# Altium PCB sonar.PcbDoc
Units mil, origin at the board's own origin, x right, y up, seen from the top; angles counter-clockwise.
Board outline 3750.01 x 3750.01 mil, 2 copper layers (Top Layer, Bottom Layer); 96 components, 84 nets, 304 pads, 59 vias.
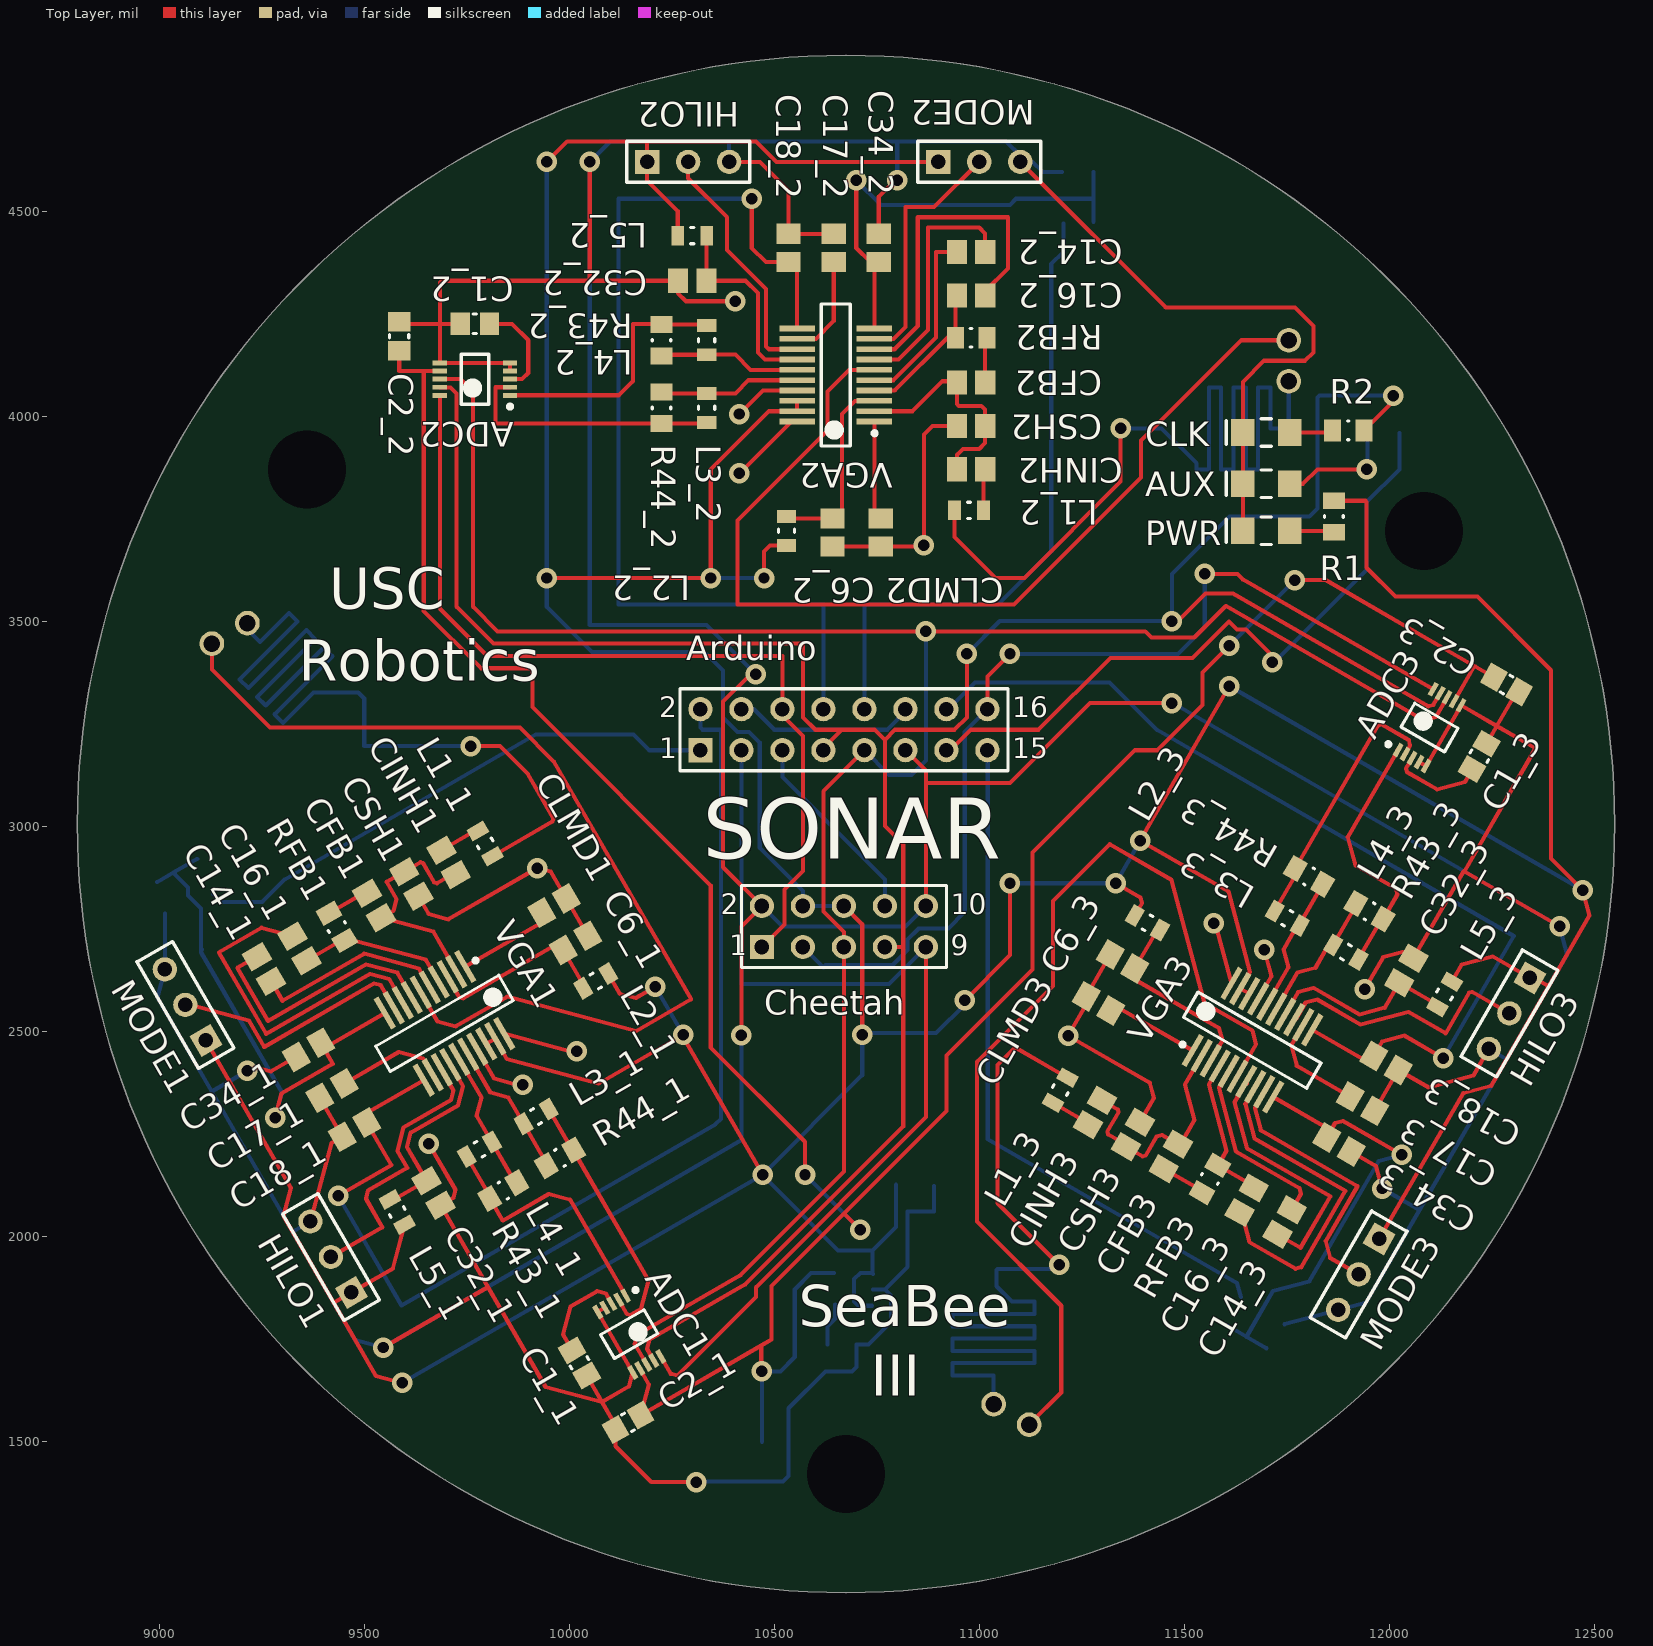
[diagram p0: Top Layer view]
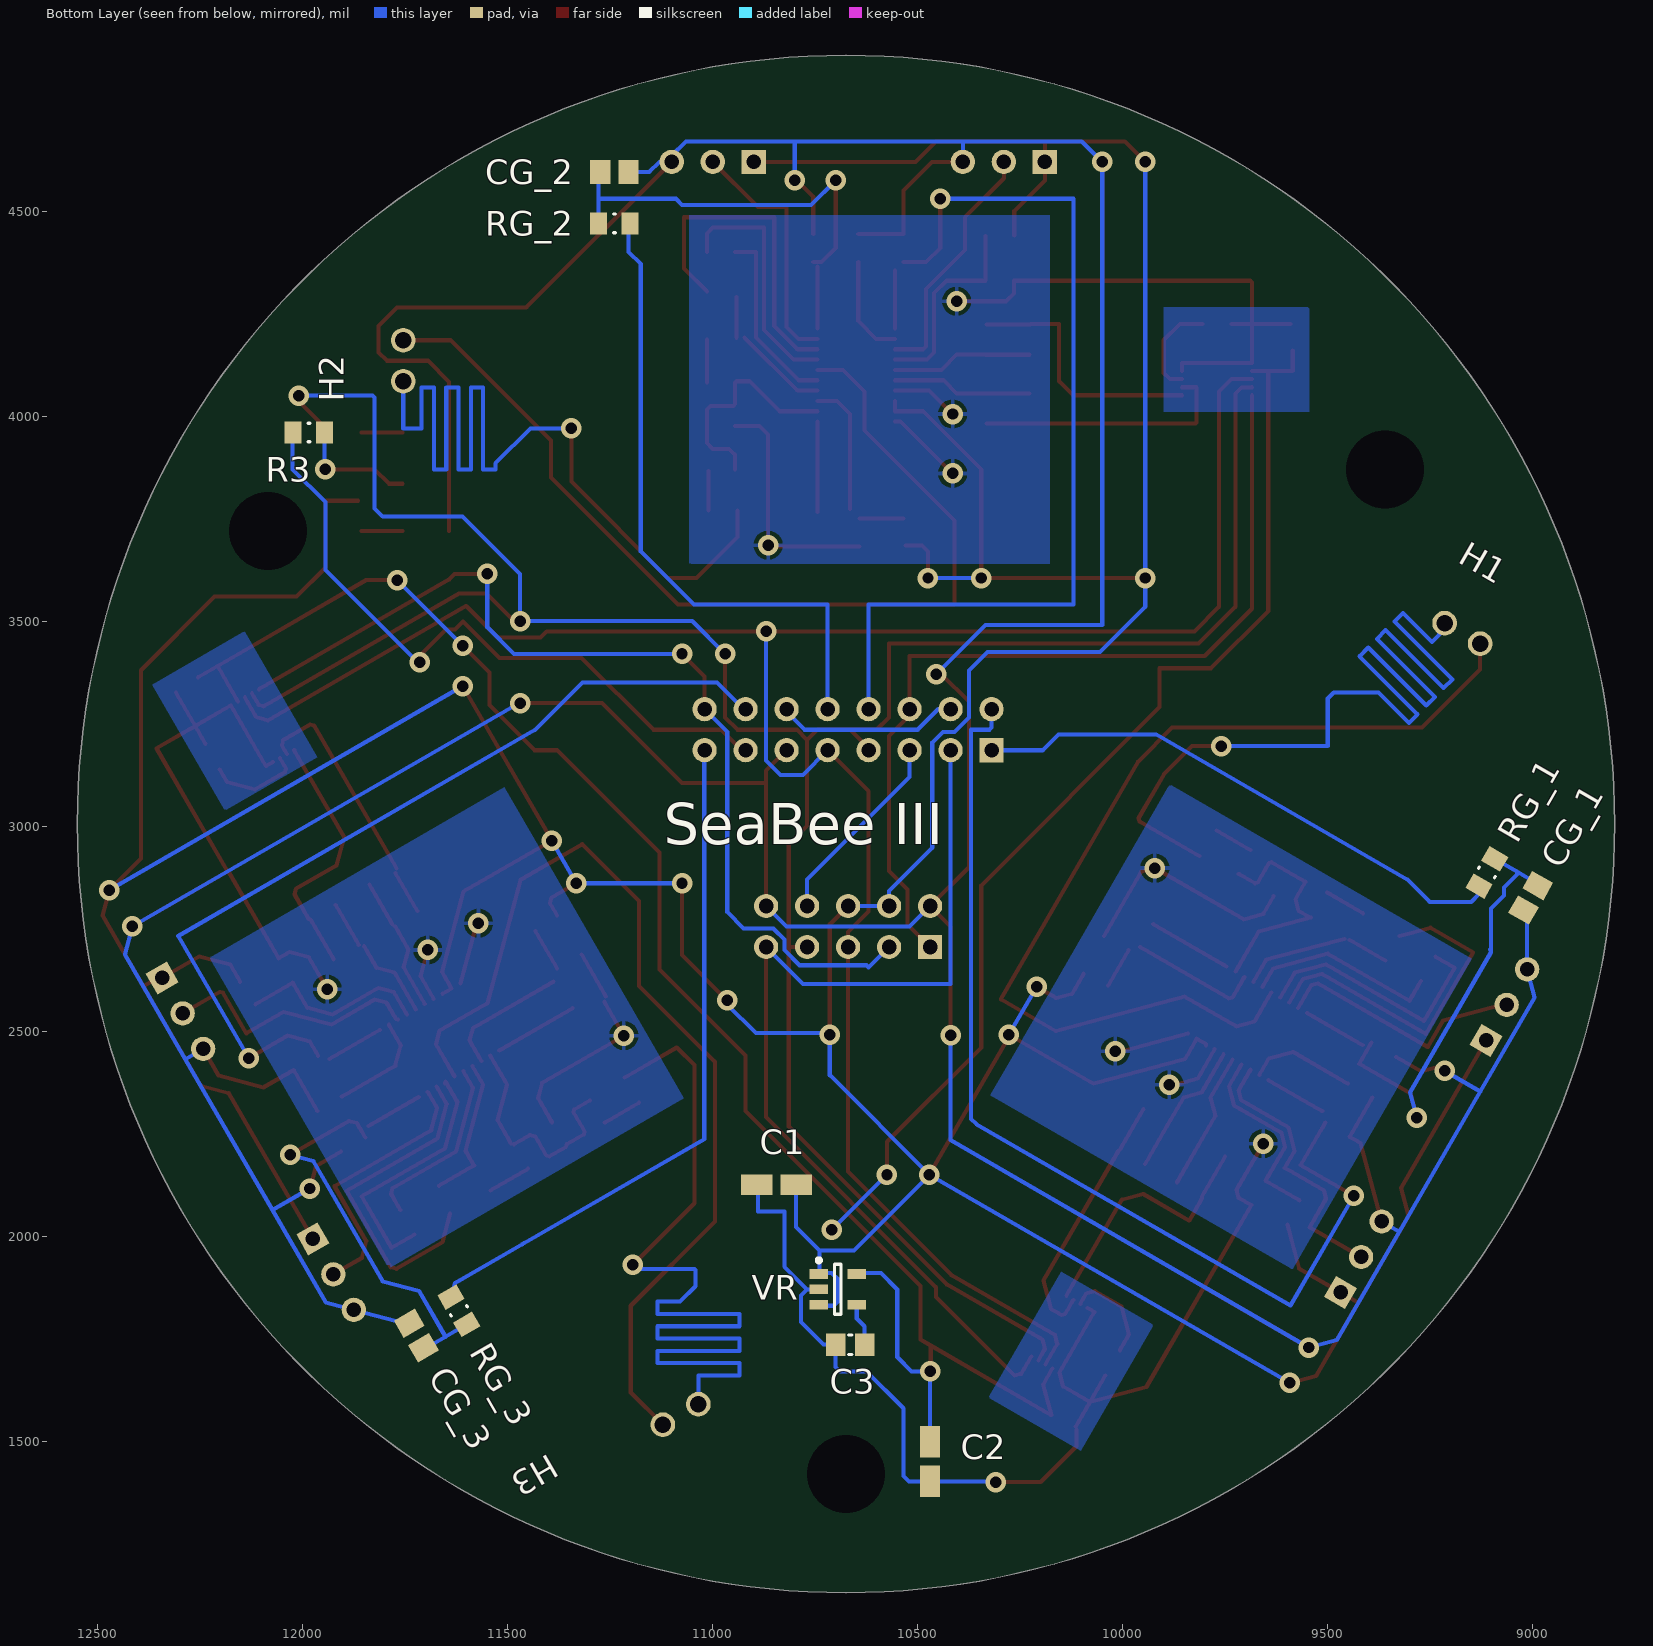
[diagram p1: Bottom Layer view, seen from below]

## Layer stack, top to bottom
Top Layer: signal copper 1.4
Dielectric: dielectric 12.6, FR-4, Dk 4.8
Bottom Layer: signal copper 1.4

## Board outline
8799.99,3005 ccw(c10675,3005) 10675,1129.99 ccw(c10675,3005) 12550.01,3005 ccw(c10675,3005) 10675,4880.01 ccw(c10675,3005)

## Design rules (kind name [scope] priority, off if disabled: settings)
Clearance [All] p1: gap=7
DiffPairsRouting [All] p1: maxlimit=10 minlimit=10 mostfreqgap=10 maxuncoupledlength=500
HoleSize [All] p1: absolutevalues=TRUE maxlimit=200 minlimit=1 maxpercent=80.000 minpercent=20.000
HoleToHoleClearance [All] p1: gap=5 allowstackedmicrovias=TRUE
MinimumSolderMaskSliver [All] p1: minsoldermaskwidth=1
PolygonConnect [All] p1: connectstyle=Relief reliefconductorwidth=10 reliefentries=4 polygonreliefangle="90 Angle"
RoomDefinition sonar [InComponentClass('sonar')] p1: confinementstyle=ConfineIn formatcopy=TRUE lockcomponents=FALSE outline 0,0 14740,0 14740,6225 0,6225
RoutingVias [All] p1: holewidth=28 width=50 viastyle="Through Hole" minholewidth=28 minwidth=50 maxholewidth=28 maxwidth=50
SilkToSilkClearance [All] p1: silktosilkclearance=0
SilkscreenOverComponentPads [All] p1: minsilkscreentomaskgap=0
SolderMaskExpansion [All] p1: expansion=4
TestPointUsage [All] p1: valid=0 allowmultiple=FALSE
Testpoint [All] p1: side=15 testpointundercomponent=TRUE minsize=40 maxsize=100 preferedsize=60 minholesize=0 maxholesize=40 preferedholesize=32 testpointgrid=1 style=1023 order=0-112345678
Width [All] p1: maxlimit=10 minlimit=10 preferedwidth=10
18 further rules are at their usual default settings.

## Classes and differential pairs
differential pair VGA1: +VGA1_P -VGA1_N
differential pair VGA2: +VGA2_P -VGA2_N
differential pair VGA3: +VGA3_P -VGA3_N
differential pair H1: +H1_P -H1_N
differential pair H2: +H2_P -H2_N
differential pair H3: +H3_P -H3_N

## Components (designator, comment, footprint, x,y, rotation, side; value= is the part's Value field where it differs from the comment)
ADC1 "LTC14031" ADC 10146.11,1760.61 r300 top
ADC2 "LTC14031" ADC 9770,4090 r180 top
ADC3 "LTC14031" ADC 12098.45,3240.06 r60 top
Arduino "Header 8X2" HDR2X8 10320,3185 r0 top
AUX "LED3" LED 11700,3835 r180 top
C1 "Cap" cap_vreg_1uf 10845,2125 r0 bottom
C1_1 "Cap" cap_adc_10uf 10024.87,1690.61 r120 top
C1_2 "Cap" cap_adc_10uf 9770,4225 r0 top
C1_3 "Cap" cap_adc_10uf 12219.69,3170.06 r240 top
C2 "Cap" cap_vreg_1uf 10470,1450 r90 bottom
C2_1 "Cap" cap_adc_10uf 10143.35,1545.4 r30 top
C2_2 "Cap" cap_adc_10uf 9585,4195 r270 top
C2_3 "Cap" cap_adc_10uf 12286.21,3345.27 r150 top
C3 "Cap" CAP_VREG_470PF 10665,1735 r180 bottom
C6_1 "Cap" CAP_VGA_01UF 10015.55,2715.06 r210 top
C6_2 "Cap" CAP_VGA_01UF 10642.05,3716.06 r90 top
C6_3 "Cap" CAP_VGA_01UF 11349.79,2669.57 r330 top
C14_1 "Cap" CAP_VGA_01UF 9255.49,2651.52 r300 top
C14_2 "Cap" CAP_VGA_01UF 10980,4400 r180 top
C14_3 "Cap" CAP_VGA_01UF 11744.89,2033.9 r60 top
C16_1 "Cap" CAP_VGA_01UF 9342.09,2701.52 r300 top
C16_2 "Cap" CAP_VGA_01UF 10980,4294.02 r180 top
C16_3 "Cap" CAP_VGA_01UF 11652.38,2087.31 r60 top
C17_1 "Cap" CAP_VGA_01UF 9421.16,2354.57 r30 top
C17_2 "Cap" CAP_VGA_01UF 10645,4410 r270 top
C17_3 "Cap" CAP_VGA_01UF 11934.71,2322.68 r150 top
C18_1 "Cap" CAP_VGA_01UF 9476.16,2259.3 r30 top
C18_2 "Cap" CAP_VGA_01UF 10535,4410 r270 top
C18_3 "Cap" CAP_VGA_01UF 11992.21,2422.27 r150 top
C32_1 "Cap" CAP_VGA_01UF 9669.1,2105.12 r120 top
C32_2 "Cap" CAP_VGA_01UF 10300,4330 r0 top
C32_3 "Cap" CAP_VGA_01UF 12041.59,2647.8 r240 top
C34_1 "Cap" CAP_VGA_01UF 9363.66,2454.16 r30 top
C34_2 "Cap" CAP_VGA_01UF 10755,4410 r270 top
C34_3 "Cap" CAP_VGA_01UF 11877.21,2223.09 r150 top
CFB1 "Cap" CAP_VGA_01UF 9523.96,2806.52 r300 top
CFB2 "Cap" CAP_VGA_01UF 10980,4082.05 r180 top
CFB3 "Cap" CAP_VGA_01UF 11467.37,2194.13 r60 top
CG_1 "Cap" CAP_VGA_01UF 9005,2825 r120 bottom
CG_2 "Cap" CAP_VGA_01UF 11240,4595 r180 bottom
CG_3 "Cap" CAP_VGA_01UF 11722.98,1757.67 r60 bottom
Cheetah "Header 5X2" HDR2X5 10470,2705 r0 top locked
CINH1 "Cap" CAP_VGA_01UF 9705.82,2911.52 r120 top
CINH2 "Cap" CAP_VGA_01UF 10980,3870.08 r0 top
CINH3 "Cap" CAP_VGA_01UF 11282.36,2300.94 r240 top
CLK "LED3" led 11700,3960 r180 top
CLMD1 "Cap" CAP_VGA_01UF 9963.05,2805.99 r210 top
CLMD2 "Cap" CAP_VGA_01UF 10760,3716.06 r90 top
CLMD3 "Cap" CAP_VGA_01UF 11290.81,2567.42 r330 top
CSH1 "Cap" CAP_VGA_01UF 9614.89,2859.02 r120 top
CSH2 "Cap" CAP_VGA_01UF 10980,3976.06 r0 top
CSH3 "Cap" CAP_VGA_01UF 11374.86,2247.54 r240 top
H1 "Header 2" bnc 9215,3495 r210 bottom locked
H2 "Header 2" bnc 11755,4085 r90 bottom locked
H3 "Header 2" bnc 11035,1590 r330 bottom locked
HILO1 "Header 3" HDR1X3 9468.62,1862.36 r120 top
HILO2 "Header 3" HDR1X3 10190,4620 r0 top
HILO3 "Header 3" HDR1X3 12342.92,2629.71 r240 top
L1_1 "FB Inductor" ind_vga_120nh 9794.93,2957.19 r120 top
L1_2 "FB Inductor" ind_vga_120nh 10975,3770 r0 top
L1_3 "FB Inductor" ind_vga_120nh 11197.47,2355.73 r240 top
L2_1 "FB Inductor" ind_vga_120nh 10064.64,2622.16 r210 top
L2_2 "FB Inductor" ind_vga_120nh 10530,3720 r90 top
L2_3 "FB Inductor" ind_vga_120nh 11410.14,2764.1 r330 top
L3_1 "FB Inductor" ind_vga_120nh 9919.36,2291.66 r210 top
L3_2 "FB Inductor" ind_vga_120nh 10335,4020 r90 top
L3_3 "FB Inductor" ind_vga_120nh 11751.29,2774.99 r330 top
L4_1 "FB Inductor" ind_vga_120nh 9780.8,2211.66 r30 top
L4_2 "FB Inductor" ind_vga_120nh 10335,4185 r270 top
L4_3 "FB Inductor" ind_vga_120nh 11894.19,2692.49 r150 top
L5_1 "FB Inductor" ind_vga_120nh 9580.53,2058.53 r120 top
L5_2 "FB Inductor" ind_vga_120nh 10300,4440 r0 top
L5_3 "FB Inductor" ind_vga_120nh 12134.88,2589.39 r240 top
MODE1 "Header 3" HDR1X3 9113.63,2477.23 r120 top
MODE2 "Header 3" HDR1X3 10900,4620 r0 top
MODE3 "Header 3" HDR1X3 11975.42,1993.18 r240 top
PWR "LED3" LED 11700,3720 r180 top
R1 "Res3" res_vga_274 11865,3755 r90 top
R2 "Res3" res_vga_274 11900,3965 r0 top
R3 "Res3" res_vga_274 11985,3960 r0 bottom
R43_1 "Res3" res_vga_274 9839.01,2110.84 r210 top
R43_2 "Res3" res_vga_274 10225,4185 r90 top
R43_3 "Res3" res_vga_274 11951.69,2792.08 r330 top
R44_1 "Res3" res_vga_274 9977.57,2190.84 r30 top
R44_2 "Res3" res_vga_274 10225,4020 r270 top
R44_3 "Res3" res_vga_274 11804.46,2877.08 r150 top
RFB1 "Res3" res_vga_274 9433.03,2754.02 r120 top
RFB2 "Res3" res_vga_274 10980,4190.98 r0 top
RFB3 "Res3" res_vga_274 11562.43,2139.24 r240 top
RG_1 "Res3" res_vga_274 9111.92,2886.78 r300 bottom
RG_2 "Res3" res_vga_274 11240,4470 r0 bottom
RG_3 "Res3" res_vga_274 11619.05,1817.67 r60 bottom
VGA1 "AD8331" VGA 9695.79,2518.9 r300 top
VGA2 "AD8331" VGA 10650,4100 r180 top
VGA3 "AD8331" VGA 11666.24,2477.68 r60 top
VR "3VOLT_REG" 3VOLT_REG 10695,1870 r180 bottom

## Footprints (in the part's own frame and the unit in brackets; to place one, negate y for a bottom-side part, rotate by r counter-clockwise, add the part's x,y. Pads: shape width x height; smd on the part's side, far side on the other; paste and mask are expansions set on the pad)
3VOLT_REG [mm] "SOT23, 5-Leads, Body 3.1x3.2mm (max), Pitch 0.95mm, IPC Medium Density"
  rect 1.15x0.6 smd: 1(-1.175,0.95) 2(-1.175,0) 3(-1.175,-0.95) 4(1.175,-0.95) 5(1.175,0.95)
  silkscreen extent -1.3,-1.55 0.2,1.92, body extent -0.9,-1.55 0.9,1.55, height 1.45
ADC [mm] "TSSOP, 10-Leads, Body 3.1x3.1mm (max), Pitch 0.50mm, IPC Medium Density"
  rect 0.889x0.305 smd: 1(-2.17,1) 2(-2.17,0.5) 3(-2.17,0) 4(-2.17,-0.5) 5(-2.171,-1) 6(2.17,-1) 7(2.17,-0.5) 8(2.171,0) 9(2.17,0.5) 10(2.17,1)
  silkscreen extent -2.3,-1.55 0.85,1.83, body extent -1.55,-1.55 1.55,1.55, height 1.1
bnc [mil]
  round 60 hole 40: 1(0,0) 2(100,0)
  body extent -275,-2275 312,106, height 625
cap_adc_10uf [mm] "Chip Capacitor, 2-Leads, Body 2.0x1.3mm, IPC Medium Density"
  rect 1.2x1.4 smd: 1(-0.9,0) 2(0.9,0)
  silkscreen extent -0.1,-0.6 0.1,0.6, body extent -1.05,-0.68 1.05,0.68, height 0.95
CAP_VGA_01UF [mm] "Chip Capacitor, 2-Leads, Body 2.0x1.3mm, IPC Medium Density"
  rect 1.25x1.5 smd: 1(-0.875,0) 2(0.875,0)
  body extent -1.11,-0.73 1.11,0.73, height 0.94
cap_vreg_1uf [mm] "Molded Capacitor, 2-Leads, Body 3.2x1.6mm, IPC Medium Density"
  rect 1.95x1.25 smd: 1(-1.225,0) 2(1.225,0)
  body extent -1.7,-0.9 1.7,0.9, height 1.8
CAP_VREG_470PF [mm] "Chip Capacitor, 2-Leads, Body 2.0x1.3mm, IPC Medium Density"
  rect 1.2x1.4 smd: 1(-0.9,0) 2(0.9,0)
  silkscreen extent -0.1,-0.6 0.1,0.6, body extent -1.05,-0.67 1.05,0.67, height 0.7
HDR1X3 [mm] "Connector; Header; 3 Position"
  rect 1.5x1.5 hole 0.9: 1(0,0)
  round 1.5 hole 0.9: 2(2.54,0) 3(5.08,0)
  silkscreen extent -1.27,-1.27 6.35,1.27
HDR2X5 [mm] "Connector; Header; 5x2 Position"
  rect 1.5x1.5 hole 0.9: 1(0,0)
  round 1.5 hole 0.9: 2(0,2.54) 3(2.54,0) 4(2.54,2.54) 5(5.08,0) 6(5.08,2.54) 7(7.62,0) 8(7.62,2.54) 9(10.16,0) 10(10.16,2.54)
  silkscreen extent -1.27,-1.27 11.43,3.81
HDR2X8 [mm] "Connector; Header; 8x2 Position"
  rect 1.5x1.5 hole 0.9: 1(0,0)
  round 1.5 hole 0.9: 2(0,2.54) 3(2.54,0) 4(2.54,2.54) 5(5.08,0) 6(5.08,2.54) 7(7.62,0) 8(7.62,2.54) 9(10.16,0) 10(10.16,2.54) 11(12.7,0) 12(12.7,2.54) 13(15.24,0) 14(15.24,2.54) 15(17.78,0) 16(17.78,2.54)
  silkscreen extent -1.27,-1.27 19.05,3.81
ind_vga_120nh [mm] "Chip Inductor, 2-Leads, Body 1.9x1.3mm, IPC Medium Density"
  rect 0.8x1.2 smd: 1(-0.9,0) 2(0.9,0)
  silkscreen extent -0.1,-0.5 0.1,0.5, body extent -1,-0.73 1,0.73, height 0.85
LED [mm] "Molded Diode, 2-Leads, Body 3.2x1.6mm, IPC Medium Density"
  rect 1.45x1.65 smd: 1(-1.45,0) 2(1.45,0)
  silkscreen extent -0.33,-0.85 2.48,0.85, body extent -1.6,-0.8 1.6,0.8, height 1.1
led [mm] "Molded Diode, 2-Leads, Body 3.2x1.6mm, IPC Medium Density"
  rect 1.45x1.65 smd: 1(-1.45,0) 2(1.45,0)
  silkscreen extent -0.33,-0.85 2.48,0.85, body extent -1.6,-0.8 1.6,0.8, height 1.1
res_vga_274 [mm] "Chip Resistor, 2-Leads, Body 2.0x1.3mm, IPC Medium Density"
  rect 1.05x1.35 smd: 1(-0.975,0) 2(0.975,0)
  silkscreen extent -0.05,-0.58 0.05,0.58, body extent -1.05,-0.68 1.05,0.68, height 0.6
VGA [mm] "SOP, 20-Leads, Body 8.8x4.0mm (max), Pitch 0.64mm, IPC Medium Density"
  rect 2.2x0.35 smd: 1(-2.4,2.88) 2(-2.4,2.24) 3(-2.4,1.6) 4(-2.4,0.96) 5(-2.4,0.32) 6(-2.4,-0.32) 7(-2.4,-0.96) 8(-2.4,-1.6) 9(-2.4,-2.24) 10(-2.4,-2.88) 11(2.4,-2.88) 12(2.4,-2.24) 13(2.4,-1.6) 14(2.4,-0.96) 15(2.4,-0.32) 16(2.4,0.32) 17(2.4,0.96) 18(2.4,1.6) 19(2.4,2.24) 20(2.4,2.88)
  silkscreen extent -2.52,-4.4 0.9,4.4, body extent -2,-4.38 2,4.38, height 1.75

## Part data
ADC1 ADC2 ADC3: library part ADC
Arduino: "Header, 8-Pin, Dual row"
AUX CLK PWR: "Typical BLUE SiC LED"
C1 C1_1 C1_2 C1_3 C2 C2_1 C2_2 C2_3 C3 C6_1 C6_2 C6_3 C14_1 C14_2 C14_3 C16_1 C16_2 C16_3 C17_1 C17_2 C17_3 C18_1 C18_2 C18_3 C32_1 C32_2 C32_3 C34_1 C34_2 C34_3 CFB1 CFB2 CFB3 CG_1 CG_2 CG_3 CINH1 CINH2 CINH3 CLMD1 CLMD2 CLMD3 CSH1 CSH2 CSH3: "Capacitor"
Cheetah: "Header, 5-Pin, Dual row"
H1 H2 H3: "Header, 2-Pin"
HILO1 HILO2 HILO3 MODE1 MODE2 MODE3: "Header, 3-Pin"
L1_1 L1_2 L1_3 L2_1 L2_2 L2_3 L3_1 L3_2 L3_3 L4_1 L4_2 L4_3 L5_1 L5_2 L5_3: library part Inductor, "Inductor"
R1 R2 R3 R43_1 R43_2 R43_3 R44_1 R44_2 R44_3 RFB1 RFB2 RFB3 RG_1 RG_2 RG_3: "Resistor"
VGA1 VGA2 VGA3: library part VGA

## Free pads (board coordinates)
  round 130 hole 190: 1(9360,3870) 2(12085,3720) 3(10675,1420)

## Via types
v1: diameter 50, hole 28, Top Layer to Bottom Layer, 59 vias

## Nets (pads, with @x,y where several pads share a name; then routed paths per layer and width w, separated by ;. In a path a pad name is that pad's centre, name@x,y a point inside that pad or via, vN(x,y) a via of type N, cw(c..) or ccw(c..) an arc to the next point about the centre after c; other vN are vias at no path point)
3V: ADC1.7 ADC2.7 ADC3.7 C2.2 C2_1.2 C2_2.2 C2_3.2 VR.5 | length 6969.9
  Top Layer w10: C2_2.2@9585.32,4159.25 9585.32,4109.68 9645,4109.68 ; ADC2.7 9645,4109.68 ; ADC1.7 10194.12,1638.08 C2_1.2 10468.27,1732.99 ; v1@10468.27,1671.73 10468.27,1732.99 ; v1(10575,2150) 10575,2230 10345,2460 10345,2855 9910,3290 9910,3385 9785,3385 9645,3525 9645,4109.68 ; v1(10710,2015) 10670,2055 ; v1(11610,3440) 11545,3375 11545,3295 11435,3185 11380,3185 11130,2935 11130,2650 10920,2440 10920,2305 10670,2055 ; v1(11770,3600) 11845,3600 12210.47,3389 C2_3.2 ; ADC3.7 12206.56,3387.95 ; 10468.27,1732.99 10493.52,1747.57 10493.52,1878.52 10670,2055
  Bottom Layer w10: C2.2 v1(10470,1670) 10515,1670 10550,1705 10550,1870 10590,1910 VR.5@10646.14,1910 ; v1(10575,2150) v1(10710,2015) ; v1(11610,3440) v1(11770,3600)
5V: C1.1 Cheetah.4 Cheetah.6 HILO1.1 HILO2.1 HILO3.1 L2_1.1 L2_2.1 L2_3.1 L5_1.1 L5_2.1 L5_3.1 MODE1.1 MODE2.1 MODE3.1 R1.2 VGA1.18 VGA1.19 VGA2.18 VGA2.19 VGA3.18 VGA3.19 VR.1 VR.3 | length 15636.5
  Top Layer w10: MODE1.1 9321.12,2117.83 9302.82,2049.53 9425.32,1837.36 ; v1(9592.66,1641.9) 9528.2,1659.18 9425.32,1837.36 ; L5_1.1 9569.51,1920.6 HILO1.1 9425.32,1837.36 ; VGA1.18@9796.49,2464.48 VGA1.18 VGA1.19 9847.97,2431.68 10071.15,2371.88 v1(10277.64,2491.1) ; v1(9945,3605) v1@10340,3605 ; v1(9945,4620) 9995,4670 10190,4670 ; L2_1.1 10123.57,2590.95 10162.51,2580.51 v1(10210.14,2608.01) ; L5_2.1 10264.57,4500.43 10190,4575 HILO2.1 10190,4670 ; v1@10276.61,2487.26 v1(10471.67,2149.4) ; v1@10345,3590 v1(10345,3605) 10345,3870 10486.81,4011.81 VGA2.19 VGA2.18 ; v1(10475,3605) 10475,3670 10489.57,3684.57 L2_2.1 ; Cheetah.6 10714.53,2760.47 v1(10714.53,2490.47) ; MODE2.1 10505,4620 10455,4670 10190,4670 ; v1(10965,2575) 11075,2685 v1(11075,2860) ; v1(11333.05,2860.57) 11393.67,2825.57 11397.17,2812.51 L2_3.1 ; v1@11380.06,2972 v1(11393.05,2964.5) 11607.4,2840.74 11660.22,2643.62 VGA3.19 VGA3.18 ; v1@11392.74,2965.67 v1(11609.71,3341.49) ; R1.2 11941.61,3793.39 11945,3790 11945,3630 12015,3560 12215,3560 12395,3380 12395,2920.4 v1(12471.41,2843.99) 12488.2,2781.34 12388.72,2609.04 ; MODE3.1 12180.42,2348.25 12248.72,2366.55 12388.72,2609.04 ; L5_3.1 12176.85,2662.08 12251.98,2682.21 HILO3.1 ; HILO3.1@12349.75,2631.54 12388.72,2609.04
  Bottom Layer w10: v1(9592.66,1641.9) v1(10471.67,2149.4) ; v1(9945,4620) v1(9945,3605) 9945,3535 10055,3425 10190,3425 ; 10195.47,3425 10190,3425 ; v1(10210.14,2608.01) v1(10277.64,2491.1) ; v1(10345,3605) v1@10470,3605 ; v1@10470,3590 10475,3595 v1(10475,3605) ; Cheetah.6 Cheetah.4 10570,2841.72 10464.53,2947.19 10464.53,3203.44 10438.44,3229.53 10410.47,3229.53 10375.47,3264.53 10375.47,3379.53 10330,3425 10190,3425 ; VR.3@10738.66,1830 10705,1830 10695,1840 10695,1895 10710,1910 10738.66,1910 VR.1@10740,1908.66 ; VR.1 VR.1@10740,1908.66 ; C1.1 10796.77,2021.77 10740,1965 ; v1@10965,2565 10895,2495 10719.06,2495 v1(10714.53,2490.47) 10714.53,2392.26 v1(10471.67,2149.4) ; v1(11075,2860) 11075.57,2860.57 v1(11333.05,2860.57) v1(11393.05,2964.5) ; v1(11609.71,3341.49) v1(12471.41,2843.99) ; v1(10471.67,2149.4) 10471.13,2148.87 10655,1965 10740,1965 ; VR.1@10740,1908.66 10740,1965
12V: Arduino.4 Arduino.12 | length 439
  Bottom Layer w10: Arduino.4 10450,3285 10500,3235 10775.94,3235 Arduino.12@10820,3279.06
AUX: Arduino.13 R3.2 | length 1664.7
  Top Layer w10: Arduino.13 10930,3185 10980,3235 11145,3235 11320,3410 11520,3410 11609.15,3499.15 11628.81,3479.49 11650.51,3479.49 11715,3415 v1(11715,3400)
  Bottom Layer w10: v1(11715,3400) 11720,3400 11945,3625 11945,3790 12025,3870 R3.2@12025,3958.39
GAIN1: C34_1.2 CG_1.2 RG_1.1 VGA1.10 | length 1223.4
  Top Layer w10: v1(9282.79,2288.61) 9298.7,2348.01 9423.22,2419.9 C34_1.2 ; C34_1.2@9414.68,2465.71 VGA1.10
  Bottom Layer w10: CG_1.2@8994.3,2863.2 9038.02,2888.44 ; RG_1.1 9038.02,2888.44 ; 9103.59,2698.99 9101.76,2692.16 ; v1(9282.79,2288.61) 9299.26,2350.08 9101.76,2692.16 ; 9038.02,2888.44 9038.02,2881.98 9070,2850 9070,2830.56 9101.76,2798.8 9101.76,2692.16
GAIN2: C34_2.2 CG_2.1 RG_2.2 VGA2.10 | length 1116.4
  Top Layer w10: v1(10700,4575) 10700,4410 10734.45,4375.55 C34_2.2 ; VGA2.10 C34_2.2@10744.49,4365.04
  Bottom Layer w10: v1(10700,4575) 10760,4515 11075,4515 11090,4530 11278.39,4530 ; RG_2.2@11278.39,4473.94 11278.39,4530 ; CG_2.1@11278.39,4595 11278.39,4530
GAIN3: C34_3.2 CG_3.1 RG_3.1 VGA3.10 | length 1115.3
  Top Layer w10: VGA3.10 C34_3.2@11839.87,2268.33 ; C34_3.2 11867.65,2275.43 11887.39,2280.72 v1(12030.29,2198.22)
  Bottom Layer w10: RG_3.1 11651.82,1754.43 ; CG_3.1@11700.38,1726.4 11651.82,1754.43 ; v1@12043.95,2201.88 v1(12030.29,2198.22) 11974.47,2183.26 11804.81,1889.4 11716.02,1865.61 11651.82,1754.43
GND: ADC1.4 ADC1.5 ADC1.6 ADC2.4 ADC2.5 ADC2.6 ADC3.4 ADC3.5 ADC3.6 Arduino.11 AUX.2 C1.2 C1_1.1 C1_2.1 C1_3.1 C2.1 C2_1.1 C2_2.1 C2_3.1 C3.1 C6_1.1 C6_2.1 C6_3.1 C17_1.1 C17_2.1 C17_3.1 C18_1.1 C18_2.1 C18_3.1 C32_1.1 C32_2.1 C32_3.1 C34_1.1 C34_2.1 C34_3.1 CG_1.1 CG_2.2 CG_3.2 Cheetah.2 Cheetah.10 CLK.2 CLMD1.1 CLMD2.1 CLMD3.1 CSH1.1 CSH2.1 CSH3.1 HILO1.3 HILO2.3 HILO3.3 MODE1.3 MODE2.3 MODE3.3 PWR.2 VGA1.17 VGA1.20 VGA2.17 VGA2.20 VGA3.17 VGA3.20 VR.2 | length 22554.7
  Top Layer w10: v1(9214.43,2402.64) 9231.75,2412.64 9272.73,2401.66 C34_1.1 ; HILO1.3 9419.87,2226.8 C18_1.1 C17_1.1 ; v1(9546.13,1728.12) 9799.81,1874.59 ; C2_2.1@9590.43,4225 9684.55,4225 ; CSH1.1 9657.39,2785.4 9705.2,2772.59 v1(9921.71,2897.59) 9955.11,2888.64 CLMD1.1 C6_1.1 ; v1(9657.4,2225.38) 9722.4,2112.8 9717.12,2093.06 C32_1.1 9942.11,1632.26 10079.87,1595.35 ; C1_2.1 9684.55,4225 ; VGA1.17 9817.42,2383.82 v1@9881.9,2366.54 ; VGA1.20 10012.68,2447.82 v1(10017.96,2450.87) ; ADC2.4 ADC2.5 ADC2.6 9684.55,4225 ; C1_1.1 10079.87,1595.35 ; v1(10050,4620) 10050,4330 ; ADC1.5@10068.81,1813.13 ADC1.5 ; ADC1.4 ADC1.5 ; C2_1.1 10112.66,1487.34 10200,1400 v1@10305,1400 ; C2_1.1@10114.65,1535.1 10079.87,1595.35 ; 10205,4330 10220,4330 ; HILO2.3 10465,4620 10535,4550 C18_2.1 C17_2.1 ; v1(10405,4280) 10285,4280 10265.55,4299.45 C32_2.1 10220,4330 ; v1(10415,3860) 10541.61,3986.61 VGA2.20 ; v1(10415,4005) 10472.2,4062.2 VGA2.17 ; v1(10420,2490) 10420,2755 Cheetah.2 10375.47,2899.53 10375.47,3303.44 v1@10442.03,3370 ; C6_2.1 CLMD2.1 v1@10861.61,3681.61 ; C34_2.1 10755,4535 10795,4575 v1(10800,4575) ; Arduino.11 10870,3135 10870,3105 ; v1(10865,3685) 10865,3955 10886.06,3976.06 CSH2.1 ; Cheetah.10 10870,3105 ; MODE2.3 11455,4265 11770,4265 11815,4220 11815,4155 11795,4135 11695,4135 11642.91,4082.91 CLK.2 PWR.2 ; CLMD3.1 C6_3.1 ; CLMD3.1@11264.44,2571.73 v1(11216.66,2488.98) 11415.85,2373.98 11426,2336.1 CSH3.1 ; v1(11470,3300) 11270,3300 11075,3105 10870,3105 ; v1@11576.67,2760.33 VGA3.20 ; VGA3.17 11712.41,2633.23 v1(11695.13,2697.71) ; C34_3.1 11968.14,2170.59 v1(11982.79,2115.95) ; v1@11937.8,2598.03 11985.3,2680.3 12032.36,2692.91 C32_3.1 12079,2712.59 ; C17_3.1 C18_3.1 12096.13,2362.27 12205.42,2391.55 HILO3.3 ; ADC3.4 ADC3.5 ADC3.6 12262.42,3244.06 ; 12081.59,2717.08 12079,2712.59 ; 12181.07,2889.38 12079,2712.59 ; 12182.49,2889.76 v1(12415.42,2755.29) ; 12184.03,2890.18 12356.86,3189.53 12262.42,3244.06 ; C1_3.1 12262.42,3244.06 ; C2_3.1@12309.47,3325.57 12262.42,3244.06 ; 9684.55,4225 9684.55,4325.45 9689.09,4330 10050,4330 ; 10050,4330 10220,4330 ; ADC1.5 ADC1.6 10145.76,1633.39 10079.87,1595.35
  Bottom Layer w10: CG_1.1@9013.63,2786.57 MODE1.3 ; MODE1.3@9027.67,2664.48 MODE1.3 ; v1(9214.43,2402.64) 9127.82,2352.64 ; 9330.06,2013.3 HILO1.3 ; 9478.47,1746.25 9478.06,1746.01 ; v1@10311.77,1401.77 C2.1 10521.77,1401.77 10535,1415 10535,1580 10625,1670 10690,1670 10700.43,1680.43 C3.1 10730,1735 10785,1790 10785,1855 10770,1870 ; HILO2.3 10390,4670 ; v1(10420,2490) 10420,2234.26 v1(9546.13,1728.12) 9545.72,1727.89 9478.06,1746.01 ; v1(10455,3370) 10335,3490 10050,3490 v1(10050,4620) 10100,4670 10390,4670 ; Cheetah.2 10520,2755 10820,2755 Cheetah.10 ; VR.2 10770,1870 ; v1(10800,4575) 10800,4670 ; Cheetah.10@10868.74,2795 Cheetah.10@10870,2795 ; C1.2@10890,2121.77 10890,2060 10825,2060 10825,1925 10770,1870 ; CG_2.2@11201.61,4595 11155,4595 11130,4620 MODE2.3 11100,4635 11065,4670 10800,4670 ; v1@11475.19,3298.13 v1(12415.42,2755.29) 12433.72,2686.98 12286.22,2431.51 ; CG_3.2@11744.65,1784.94 MODE3.3 11943.72,1838.28 12073.72,2063.45 ; v1(11982.79,2115.95) 12073.72,2063.45 ; HILO3.3 12286.22,2431.51 ; MODE1.3 8995.32,2582.14 9127.82,2352.64 ; 9127.82,2352.64 9478.06,1746.01 ; 10390,4670 10800,4670 ; 12073.72,2063.45 12286.22,2431.51
  other v1: 10310,1400 9886.23,2369.04 11940.3,2602.36 11571.39,2763.38
H1_N: H1.2 VGA1.6 | length 2413.1
  Top Layer w10: H1.2 9128.4,3381.6 9270,3240 9879.73,3240 9962.1,3157.63 10297.1,2577.39 10162.87,2499.89 9848.68,2584.08 9723.11,2511.58 9678.58,2523.51 VGA1.6
H1_P: H1.1 L1_1.1 | length 2413
  Top Layer w10: v1(9760,3195) 9830.94,3195 9898.98,3126.96 9961.48,3018.7 9959.49,3011.28 L1_1.1
  Bottom Layer w10: H1.1@9215,3480 9245.61,3449.39 9316.32,3520.1 9337.53,3498.89 9196.11,3357.47 9217.32,3336.26 9358.74,3477.68 9379.96,3456.46 9238.54,3315.04 9259.75,3293.83 9401.17,3435.25 9422.38,3414.04 9280.96,3272.62 9302.18,3251.4 9376.16,3325.39 9485.39,3325.39 9500,3310.77 9500,3195 v1(9760,3195) ; H1.1@9215,3485 H1.1
H2_N: H2.2 VGA2.6 | length 2412.3
  Top Layer w10: VGA2.6 10682.6,4112.6 10630,4060 10630,3965 10410,3745 10410,3540 11085,3540 11395,3850 11395,3940 11640,4185 H2.2
H2_P: H2.1 L1_2.1 | length 2414.1
  Top Layer w10: L1_2.1 10939.57,3705.43 11040,3605 11110,3605 11345,3840 v1(11345,3970)
  Bottom Layer w10: v1(11345,3970) 11445,3970 11530,3885 11530,3870 11560,3870 11560,4070 11590,4070 11590,3870 11620,3870 11620,4070 11650,4070 11650,3870 11680,3870 11680,4070 11710,4070 11710,3970 11755,3970 H2.1
H3_N: H3.2 VGA3.6 | length 2411.4
  Top Layer w10: H3.2 11200,1618.4 11200,1830 10995,2035 10995,2425 11180,2610 11180,2817.34 11318.2,2955.54 11469.31,2868.3 11549.83,2567.78 11666.75,2500.28 11675.33,2468.23 VGA3.6
H3_P: H3.1 L1_3.1 | length 2412.6
  Top Layer w10: v1(11195,1930) 11045,2080 11045,2417.08 11087.85,2459.93 L1_3.1
  Bottom Layer w10: H3.1 11035,1660 10935,1660 10935,1690 11135,1690 11135,1720 10935,1720 10935,1750 11135,1750 11135,1780 10935,1780 10935,1810 11135,1810 11135,1840 11080,1840 11042.5,1877.5 11042.5,1917.5 11045,1920 11185,1920 v1(11195,1930)
MISO: ADC1.8 ADC2.8 ADC3.8 Arduino.9 Cheetah.5 | length 5484
  Top Layer w10: ADC2.8 9735,4090 9765,4060 9765,3535 9825,3475 v1(10870,3475) 11405,3475 11420,3460 11524.39,3460 11601.28,3536.89 12084.47,3257.92 12113.2,3265.61 ADC3.8 ; ADC1.8 10159.82,1736.87 10165.8,1759.19 10416.95,1904.19 10670,2157.24 Cheetah.5 10670,2742.03 10620,2792.03 10620,3085 Arduino.9
  Bottom Layer w10: Arduino.9 10780,3125 10835,3125 10870,3160 v1(10870,3475)
MOSI: Arduino.5 Cheetah.8 | length 483.6
  Bottom Layer w10: Arduino.5 10520,3120 10770,2870 Cheetah.8
NetADC1_3: ADC1.3 C1_1.2 | length 241
  Top Layer w10: C1_1.2 9984.87,1759.89 10003.17,1828.2 10068.12,1865.7 10088.61,1860.21 ADC1.3
NetADC2_3: ADC2.3 C1_2.2 | length 241.9
  Top Layer w10: C1_2.2 9860,4225 9900,4185 9900,4105 9885,4090 ADC2.3
NetADC3_3: ADC3.3 C1_3.2 | length 229.3
  Top Layer w10: ADC3.3 12040.7,3140.04 12042.91,3131.8 12116.52,3089.3 12184.82,3107.61 C1_3.2@12202.35,3137.97
NetArduino_1: Arduino.1 RG_1.2 | length 1330.1
  Bottom Layer w10: RG_1.2@9131.11,2833.89 9150,2815 9251.09,2815 9305.45,2869.36 9918.93,3223.56 10156.44,3223.56 10195,3185 Arduino.1
NetArduino_10: Arduino.10 RG_2.1 | length 1586.3
  Bottom Layer w10: Arduino.10 10720,3540 11045.55,3540 11175.55,3670 11175.55,4185 ; 11175.55,4195 11175.55,4185 ; 11175.55,4370 11175.55,4185 ; 11175.55,4370.55 11205.55,4400.55 RG_2.1@11205.55,4470
NetArduino_15: Arduino.15 RG_3.2 | length 1690.8
  Bottom Layer w10: Arduino.15@11020.75,3184.25 11020.75,2236.29 11460.22,1982.56 ; 11464.55,1980.06 11460.22,1982.56 ; RG_3.2 11629.1,1885.06 11460.22,1982.56
NetAUX_1: AUX.1 R3.1 | length 308.7
  Top Layer w10: AUX.1@11775,3835 AUX.1 11790,3835 11825,3870 v1(11945,3870)
  Bottom Layer w10: v1@11946.61,3871.61 R3.1
NetC3_2: C3.2 VR.4 | length 104.9
  Bottom Layer w10: C3.2@10630,1735.43 10630,1780 10648.74,1798.74 VR.4
NetC6_1_2: C6_1.2 L2_1.2 VGA1.3 | length 418
  Top Layer w10: VGA1.3 9731.84,2582.44 9741.41,2579.88 C6_1.2@9958.39,2705.15 ; C6_1.2 L2_1.2@10035.75,2611.16
NetC6_2_2: C6_2.2 L2_2.2 VGA2.3 | length 431.4
  Top Layer w10: L2_2.2@10534.92,3750.51 C6_2.2 ; C6_2.2@10665,3773.46 10665,4005 10697.01,4037.01 VGA2.3
NetC6_3_2: C6_3.2 L2_3.2 VGA3.3 | length 422.3
  Top Layer w10: C6_3.2 L2_3.2@11432.66,2744.2 ; C6_3.2@11388.03,2620.99 11585.13,2507.19 11593.19,2477.13 VGA3.3
NetC14_1_1: C14_1.1 VGA1.7 | length 629.6
  Top Layer w10: C14_1.1@9237.51,2681.55 9190.36,2654.33 9265.36,2524.42 9504.87,2662.71 9580.88,2642.34 VGA1.7
NetC14_1_2: C14_1.2 VGA1.5 | length 476.5
  Top Layer w10: C14_1.2 9300.49,2573.57 9499.68,2688.57 9633,2652.85 VGA1.5
NetC14_2_1: C14_2.1 VGA2.7 | length 601.4
  Top Layer w10: VGA2.7 10802.8,4137.8 10875,4210 10875,4460 11000,4460 11014.45,4445.55 C14_2.1
NetC14_2_2: C14_2.2 VGA2.5 | length 452.6
  Top Layer w10: VGA2.5 10790.7,4087.4 10895,4191.7 10895,4400 C14_2.2
NetC14_3_1: C14_3.1 VGA3.7 | length 623.7
  Top Layer w10: VGA3.7@11652.94,2372.43 VGA3.7 11622.58,2326.46 11652.67,2214.16 11856.18,2096.66 11783.68,1971.09 C14_3.1@11727.87,2003.31
NetC14_3_2: C14_3.2 VGA3.5 | length 445.8
  Top Layer w10: VGA3.5 11584.98,2362.13 11626.82,2205.99 11781.23,2116.84 11784.89,2103.18 C14_3.2
NetC16_1_1: C16_1.1 VGA1.8 | length 836.1
  Top Layer w10: C16_1.1 9249.74,2751.48 9249.46,2751.96 9145.54,2691.96 9260.54,2492.77 9514.53,2639.41 9560.6,2627.07 VGA1.8
NetC16_1_2: C16_1.2 RFB1.1 VGA1.4 | length 360.9
  Top Layer w10: C16_1.2 RFB1.1@9446.84,2722.21 ; RFB1.1@9459.48,2724.97 9649.92,2673.94 VGA1.4
NetC16_2_1: C16_2.1 VGA2.8 | length 818.2
  Top Layer w10: VGA2.8 10793.79,4162.99 10850,4219.2 10850,4485 11070,4485 11070,4360 C16_2.1@11014.45,4304.45
NetC16_2_2: C16_2.2 RFB2.1 VGA2.4 | length 330.5
  Top Layer w10: VGA2.4 10793.79,4062.2 RFB2.1@10922.57,4190.98 ; RFB2.1 C16_2.2@10941.61,4290.08
NetC16_3_1: C16_3.1 VGA3.8 | length 822.3
  Top Layer w10: C16_3.1@11640.59,2054.34 11659.09,1985.29 11771.67,1920.29 11785.33,1923.95 11892.83,2110.14 11671.31,2238.04 11648.9,2321.66 VGA3.8
NetC16_3_2: C16_3.2 RFB3.1 VGA3.4 | length 360.2
  Top Layer w10: RFB3.1 C16_3.2@11668.17,2122.52 ; RFB3.1@11582.56,2172.73 11603.03,2208.18 11559.91,2369.09 VGA3.4
NetC17_1_2: C17_1.2 VGA1.12 | length 261.5
  Top Layer w10: C17_1.2 9584.44,2448.84 9643.55,2433 VGA1.12
NetC17_2_2: C17_2.2 VGA2.12 | length 251.5
  Top Layer w10: VGA2.12 10601.73,4188.19 10645,4231.46 C17_2.2
NetC17_3_2: C17_3.2 VGA3.12 | length 260.3
  Top Layer w10: VGA3.12 11761.02,2465.46 11774.5,2415.18 C17_3.2
NetC32_1_2: C32_1.2 L5_1.2 VGA1.14 | length 468.8
  Top Layer w10: L5_1.2@9569.54,2087.41 C32_1.2 9604.1,2217.7 9613.25,2251.85 9728.68,2318.49 9741.1,2364.83 VGA1.14
NetC32_2_2: C32_2.2 L5_2.2 VGA2.14 | length 494.6
  Top Layer w10: L5_2.2@10334.45,4439.02 C32_2.2 10430,4330 10460,4300 10460,4155 10477.2,4137.8 VGA2.14
NetC32_3_2: C32_3.2 L5_3.2 VGA3.14 | length 471
  Top Layer w10: VGA3.14 11777.87,2595.44 11815.04,2605.39 11927.62,2540.39 11989.09,2556.87 C32_3.2 L5_3.2@12115.37,2565.43
NetCFB1_1: CFB1.1 RFB1.2 | length 101.1
  Top Layer w10: RFB1.2 CFB1.1@9501.36,2837.79
NetCFB1_2: CFB1.2 CINH1.1 CSH1.2 VGA1.2 | length 566
  Top Layer w10: CFB1.2 CFB1.2@9541.94,2776.48 ; CINH1.1@9716.97,2883.31 9677.52,2860.53 9670.69,2862.37 9643.19,2910 9637.12,2911.62 CSH1.2 9554.84,2864.12 9554.64,2863.37 9579.09,2821.03 9571.77,2793.7 CFB1.2@9541.94,2776.48 ; VGA1.2 9668.48,2742.57 CFB1.2@9541.94,2776.48
NetCFB2_1: CFB2.1 RFB2.2 | length 105
  Top Layer w10: CFB2.1 RFB2.2@11014.45,4187.05
NetCFB2_2: CFB2.2 CINH2.1 CSH2.2 VGA2.2 | length 557.3
  Top Layer w10: VGA2.2 10836.81,4011.81 10910,4085 10942.6,4085 CFB2.2 10945.55,4029.45 10950,4025 11005,4025 11014.45,4015.55 CSH2.2 11014.45,3934.45 11000,3920 10960,3920 10945.55,3905.55 CINH2.1
NetCFB3_1: CFB3.1 RFB3.2 | length 105.8
  Top Layer w10: CFB3.1 RFB3.2@11541.8,2111.38
NetCFB3_2: CFB3.2 CINH3.1 CSH3.2 VGA3.2 | length 565
  Top Layer w10: CINH3.1 11338.24,2308.46 11339.87,2302.38 11312.37,2254.75 11314.2,2247.92 CSH3.2@11356.01,2223.78 ; CSH3.2 11398.1,2194.34 11405.68,2196.37 11432.63,2243.05 11445.54,2246.51 CFB3.2 ; CFB3.2@11492.04,2225.96 11524.59,2282.33 11501.46,2368.65 VGA3.2
NetCINH1_2: CINH1.2 L1_1.2 | length 96
  Top Layer w10: CINH1.2 L1_1.2@9771.72,2989.34
NetCINH2_2: CINH2.2 L1_2.2 | length 96.1
  Top Layer w10: L1_2.2 CINH2.2@11010.43,3866.06
NetCINH3_2: CINH3.2 L1_3.2 | length 96.9
  Top Layer w10: L1_3.2 CINH3.2@11263.66,2276.6
NetCLK_1: CLK.1 R2.1 | length 99.5
  Top Layer w10: CLK.1 R2.1@11856.61,3960
NetCLMD1_2: CLMD1.2 VGA1.1 | length 206.7
  Top Layer w10: VGA1.1 CLMD1.2@9925.71,2760.75
NetCLMD2_2: CLMD2.2 VGA2.1 | length 220.6
  Top Layer w10: CLMD2.2@10744.49,3766.02 VGA2.1
NetCLMD3_2: CLMD3.2 VGA3.1 | length 206.7
  Top Layer w10: CLMD3.2@11341.84,2555.87 VGA3.1
NetHILO1_2: HILO1.2 VGA1.13 | length 679.3
  Top Layer w10: HILO1.2 9544.2,2021.46 9504.2,2090.74 9509.69,2111.23 9604.95,2166.23 9580.81,2208.05 9596.08,2265.03 9711.51,2331.67 9717.73,2354.91 VGA1.13
NetHILO2_2: HILO2.2 VGA2.13 | length 607.1
  Top Layer w10: HILO2.2 10290,4580 10385,4485 10385,4405 10480,4310 10480,4170 10487.01,4162.99 VGA2.13
NetHILO3_2: HILO3.2 VGA3.13 | length 655.6
  Top Layer w10: VGA3.13 11772.56,2529.22 11795.66,2569.24 11824.34,2576.93 11930.61,2515.57 12046.72,2546.69 12137.65,2494.19 12195.15,2593.78 12201.98,2595.61 HILO3.2
NetL3_1_2: L3_1.2 R44_1.1 VGA1.16 | length 340.8
  Top Layer w10: VGA1.16 9808,2349.74 9851.67,2338.04 L3_1.2 R44_1.1@9945.41,2175.68
NetL3_2_2: L3_2.2 R44_2.1 VGA2.16 | length 340.5
  Top Layer w10: R44_2.1@10227.95,4055.43 L3_2.2 ; L3_2.2@10335.43,4055 10405,4055 10437.4,4087.4 VGA2.16
NetL3_3_2: L3_3.2 R44_3.1 VGA3.16 | length 326.5
  Top Layer w10: VGA3.16 11754.13,2655.1 11742.27,2699.37 L3_3.2@11774.56,2755.28 ; L3_3.2@11781.23,2760.07 R44_3.1
NetL4_1_2: L4_1.2 R43_1.1 VGA1.15 | length 340.5
  Top Layer w10: VGA1.15 9786.18,2337.14 9774.32,2292.88 R43_1.1@9867.62,2131.27
NetL4_2_2: L4_2.2 R43_2.1 VGA2.15 | length 342.6
  Top Layer w10: R43_2.1@10227.95,4149.57 L4_2.2 ; L4_2.2@10335.43,4150 10405,4150 10442.4,4112.6 VGA2.15
NetL4_3_2: L4_3.2 R43_3.1 VGA3.15 | length 321.4
  Top Layer w10: VGA3.15 11775.95,2642.51 11820.21,2654.37 L4_3.2@11850.43,2706.7 ; L4_3.2 R43_3.1@11919.52,2807.24
NetMODE1_2: MODE1.2 VGA1.9 | length 621
  Top Layer w10: MODE1.2@9067.96,2566.34 9218.22,2526.07 9255.72,2461.12 9524.19,2616.12 9540.32,2611.8 VGA1.9
NetMODE2_2: MODE2.2 VGA2.9 | length 605.7
  Top Layer w10: VGA2.9 10790.7,4188.19 10820,4217.49 10820,4510 10890,4510 MODE2.2
NetMODE3_2: MODE3.2 VGA3.9 | length 651.7
  Top Layer w10: VGA3.9 11672.27,2311.73 11686.65,2258.05 11922.65,2121.8 11845.15,1987.56 11856.13,1946.58 MODE3.2
NetPWR_1: PWR.1 R1.1 | length 99.5
  Top Layer w10: PWR.1 R1.1@11856.61,3720
SCLK: ADC1.9 ADC2.9 ADC3.9 Arduino.7 Cheetah.7 R2.2 | length 6603.1
  Top Layer w10: ADC2.9 9684.86,4070 9710,4070 9725,4055 9725,3535 9815,3445 10570,3445 10570,3265 10600,3235 10665,3235 ; ADC1.9 10189.53,1724.79 10195.62,1747.54 10429.45,1882.54 10814.53,2267.62 10814.53,2705 ; Arduino.7@10620,3190 10665,3235 ; Cheetah.7 10814.53,2705 ; v1(10970,3420) 10970,3265 10940,3235 10795,3235 10770,3210 ; v1(11470,3500) 11485,3500 11552.2,3567.2 11618.78,3567.2 12095.1,3292.2 12107.78,3295.6 ADC3.9 ; R2.2 12010,4036.61 v1(12010,4050) ; 10665,3235 10745,3235 10770,3210 ; 10770,3210 10770,3000 10814.53,2955.47 10814.53,2705
  Bottom Layer w10: v1(10970,3420) 11050,3500 v1(11470,3500) 11470,3615 11610,3755 11805,3755 11825,3775 11825,4045 11830,4050 v1(12010,4050) v1@11990,4050
SS1: ADC1.10 Arduino.3 Cheetah.9 | length 2419.3
  Top Layer w10: ADC1.10 10247.26,1664.16 10263.61,1659.78 10455,1851.16 10455,1875 10870,2290 Cheetah.9
  Bottom Layer w10: Arduino.3 10420,3065 10420,2615 10780,2615 Cheetah.9
SS2: ADC2.10 Arduino.6 Cheetah.1 | length 2176.3
  Top Layer w10: ADC2.10 9684.55,3540 9685,3539.55 9685,3530 9800,3415 10520,3415 Arduino.6 10520,3270 10570,3220 10570,2890 10525,2845 10525,2825 ; Cheetah.1 10525,2760 10525,2825 ; 10525.47,2825.47 10525,2825
SS3: ADC3.10 Arduino.16 Cheetah.3 | length 2426.8
  Top Layer w10: Arduino.16 11020,3365 v1(11075,3420) ; v1(11550,3615) 11629.42,3615 11642.39,3602.03 ADC3.10
  Bottom Layer w10: Cheetah.3 10620,2655 10625.47,2660.47 10788.44,2660.47 10825.47,2697.5 10825.47,2723.44 10851.56,2749.53 ; 10852.5,2750.47 10924.53,2750.47 10964.53,2790.47 10964.53,3229.53 Arduino.16 ; v1(11075,3420) 11485,3420 11550,3485 v1(11550,3615)
VCM1: Arduino.2 C18_1.2 VGA1.11 | length 2694.5
  Top Layer w10: v1@9435.81,2098.08 9436.29,2098.36 9565.72,2173.08 C18_1.2 C18_1.2@9513.77,2263.06 ; C18_1.2@9513.5,2304.55 VGA1.11
  Bottom Layer w10: v1(9436.57,2097.88) 9590.89,1830.58 10356.99,2272.89 10370,2285.9 10370,3235 10325,3235 10320,3240 Arduino.2
VCM2: Arduino.8 C18_2.2 VGA2.11 | length 2435.9
  Top Layer w10: v1(10445,4530) 10445,4410 10479.45,4375.55 C18_2.2 ; VGA2.11 C18_2.2@10555.51,4355.04
  Bottom Layer w10: v1(10445,4530) 10120,4530 10120,3540 10620,3540 Arduino.8
VCM3: Arduino.14 C18_3.2 VGA3.11 | length 2280.2
  Top Layer w10: VGA3.11 C18_3.2@11934.36,2431.99 ; C18_3.2 11982.65,2474.62 12036.54,2489.05 v1(12131.8,2434.05)
  Bottom Layer w10: Arduino.14@10925,3285 10990,3350 11317.86,3350 11433.43,3234.43 12303.78,2731.93 v1(12131.8,2434.05)
VGA1_N: ADC1.2 L3_1.1 R44_1.2 | length 630.2
  Top Layer w10: L3_1.1 R44_1.2@10006.78,2211.11 ; R44_1.2@10010.38,2208.39 10193.74,1890.79 10175.44,1822.49 10149.46,1807.49 10140.37,1809.93 ADC1.2
VGA1_P: ADC1.1 L4_1.1 R43_1.2 | length 630
  Top Layer w10: L4_1.1 R43_1.2@9806.84,2095.68 ; R43_1.2@9806.55,2091.43 9837.73,2037.43 9950.31,2102.43 10002.26,2088.51 ADC1.1
VGA2_N: ADC2.2 L3_2.1 R44_2.2 | length 630
  Top Layer w10: 9820.31,3984.69 9820.31,4070.31 ADC2.2 ; 9822.95,3982.05 9823.39,3981.61 R44_2.2 L3_2.1@10332.05,3981.61
VGA2_P: ADC2.1 L4_2.1 R43_2.2 | length 629.2
  Top Layer w10: ADC2.1 10120.63,4050.63 10155,4085 10155,4225 R43_2.2@10223.39,4225 ; R43_2.2 L4_2.1@10332.05,4223.39
VGA3_N: ADC3.2 L3_3.1 R44_3.2 | length 632.8
  Top Layer w10: L3_3.1 R44_3.2@11774.13,2885.41 ; R44_3.2 11972.37,3244.67 11982.64,3247.43 12047.6,3209.93 12051,3197.24 ADC3.2
VGA3_P: ADC3.1 L4_3.1 R43_3.2 | length 629.5
  Top Layer w10: L4_3.1 R43_3.2@11980.9,2771.81 ; R43_3.2 12020.22,2834 12016.83,2846.64 11917.24,2904.14 11898.79,2972.98 ADC3.1 ADC3.1@12019.82,3185.26

## Polygon pours and split planes (outlines as drawn)
GND on Bottom Layer "Bottom Layer-No Net" (solid, pour order 1001): 9890.16,3093.13 10322.74,2343.87 9590.4,1921.05 9588.71,1914.37 9148.71,2676.47 9885.21,3101.69 9890.16,3093.13
GND on Bottom Layer "Bottom Layer-No Net" (solid, pour order 1000): 10150.39,1913.2 10327.89,1605.76 10102.73,1475.76 9925.23,1783.2 10150.39,1913.2
GND on Bottom Layer "Bottom Layer-No Net" (solid, pour order 1000): 11785.38,1923.92 11070.86,2336.45 11508.36,3094.22 12218.61,2684.16 12227.16,2679.22 11794.66,1930.11 11787.88,1928.25
GND on Bottom Layer "Bottom Layer-No Net" (solid, pour order 1001): 11057.65,3634.78 11052.65,3639.78 10177.65,3639.78 10177.65,4489.78 11057.65,4489.78 11057.65,3639.78
GND on Bottom Layer "Bottom Layer-No Net" (solid, pour order 1002): 9895.07,4010 9545,4010 9545,4265 9900,4265 9900,4010 9895.07,4010
GND on Bottom Layer "Bottom Layer-No Net" (solid, pour order 1003): 11964.16,3167.47 12144.16,3479.24 12145.99,3472.41 12366.83,3344.91 12189.33,3037.47 11964.16,3167.47

## Silkscreen, mask and mechanical layers (free items; w line width, h text height)
Top Overlay:
  text "USC" at 9415,3530 h100
  text "Robotics" at 9340,3355 h100
  text "SONAR" at 10325,2920 h150
  text "SeaBee" at 10560,1780 h100
  text "III" at 10735,1610 h100
Bottom Overlay:
  text "SeaBee III" at 11120,2955 h100

## Text inside footprints (layer, text, board x,y; h text height)
Arduino: Top Overlay "2" at 10220,3265 h50; Top Overlay "1" at 10220,3165 h50; Top Overlay "15" at 11080,3165 h50; Top Overlay "16" at 11080,3265 h50
Cheetah: Top Overlay "10" at 10930,2785 h50; Top Overlay "9" at 10930,2685 h50; Top Overlay "1" at 10390,2685 h50; Top Overlay "2" at 10370,2785 h50